# EAGLE board Large_Digit_Driver_Panel_v10 (EAGLE 7.2.0)
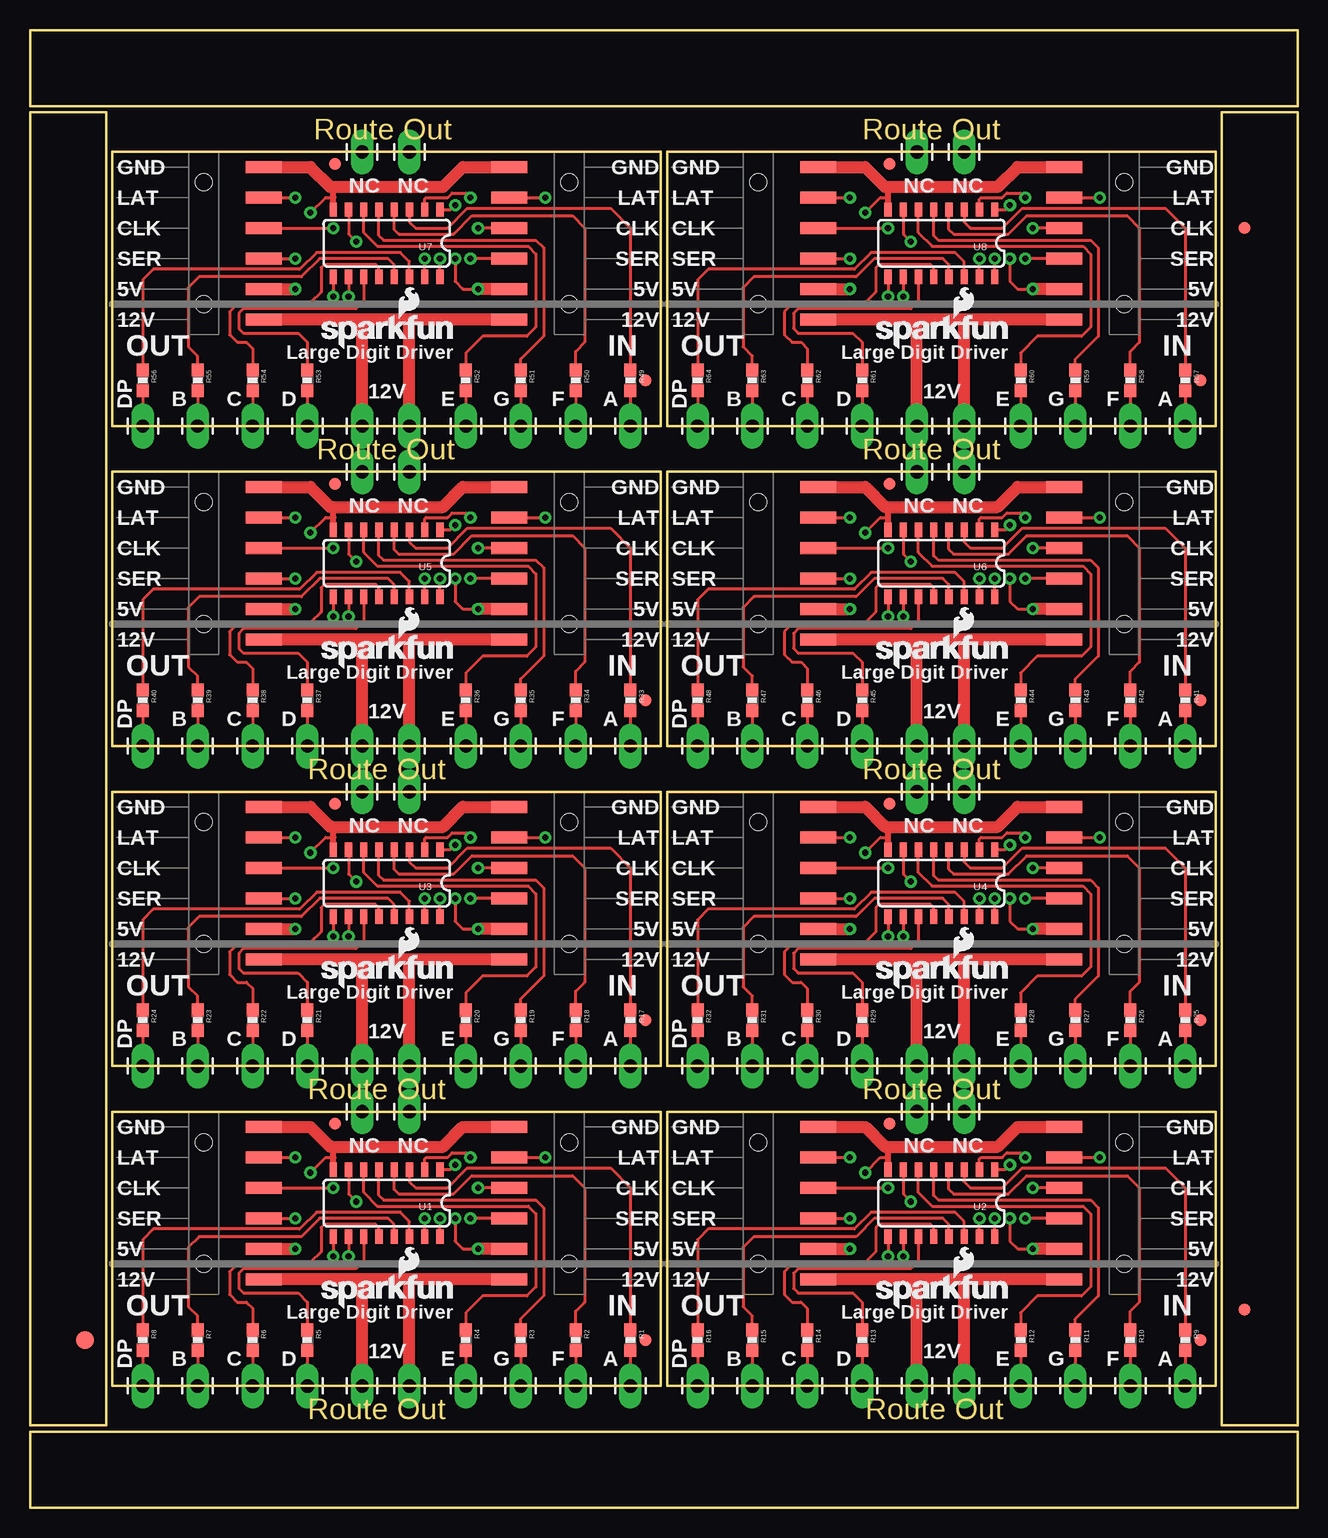
[diagram p0: board, top side]
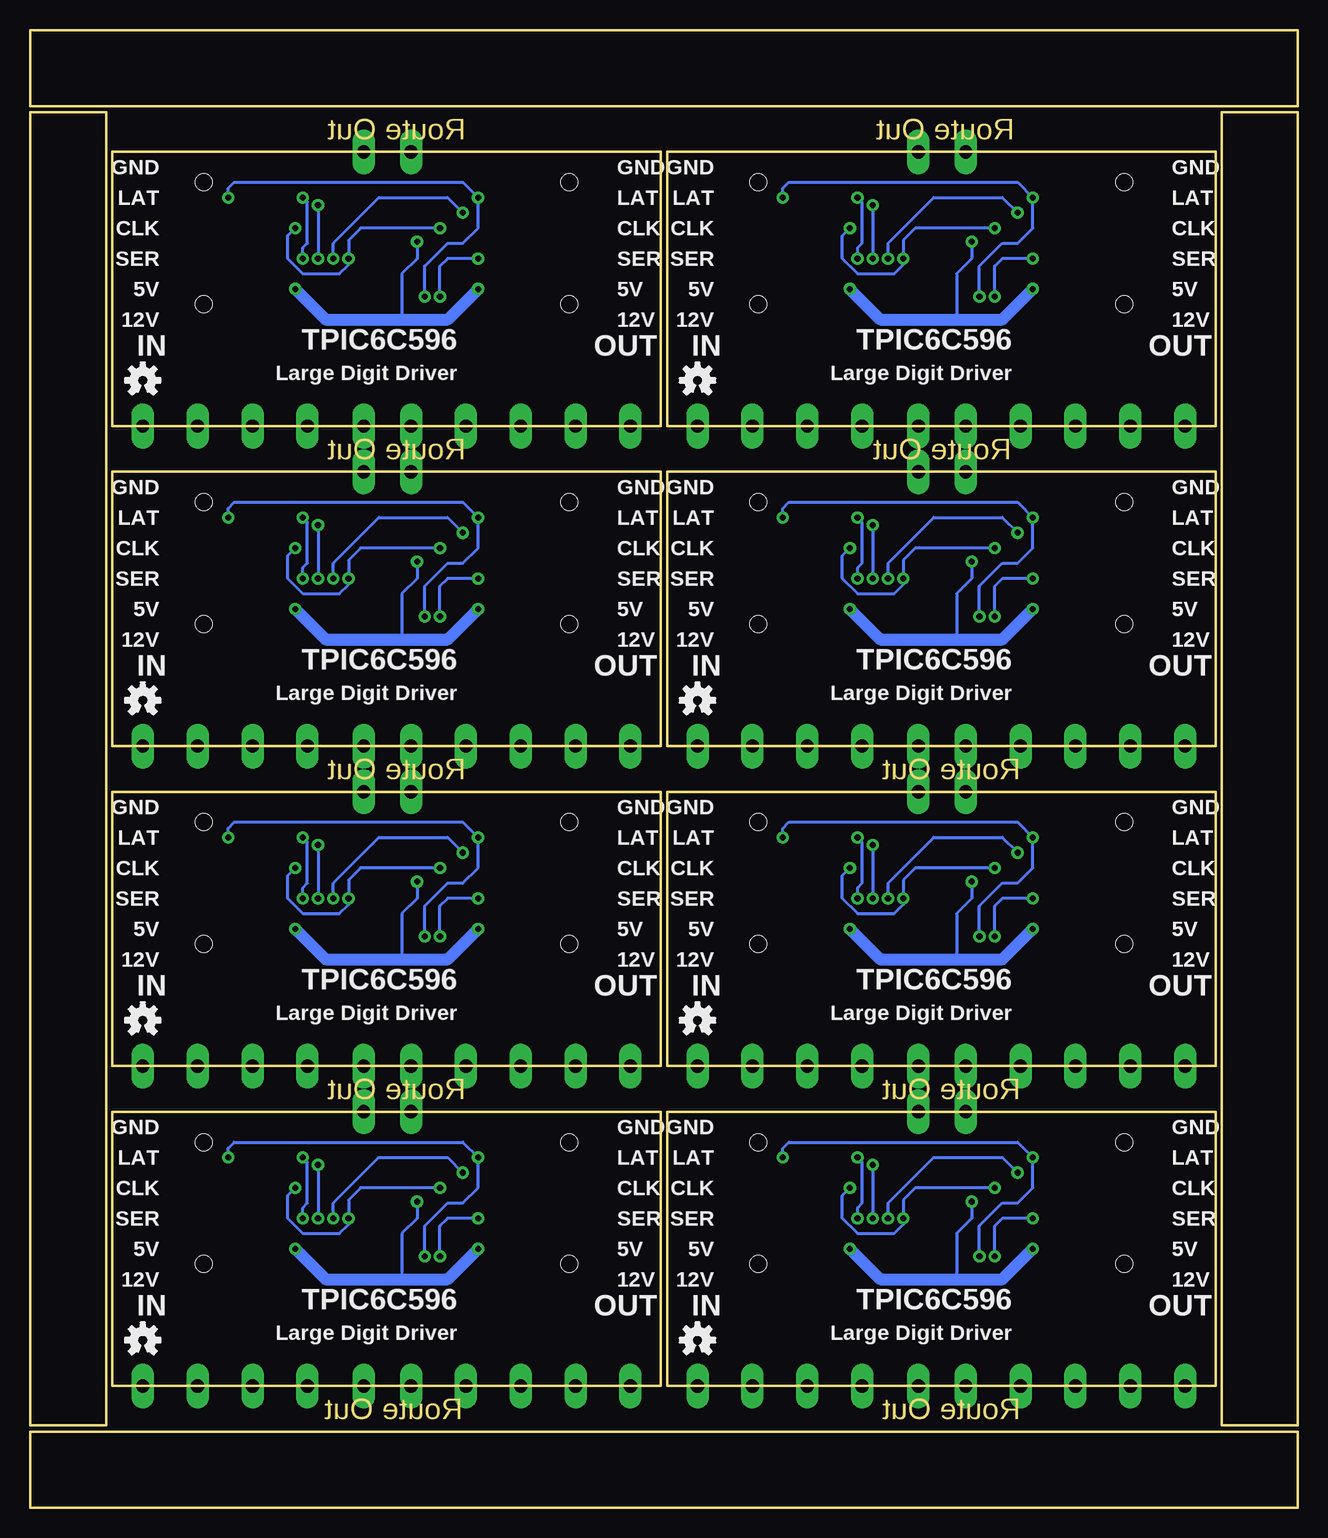
[diagram p1: board, bottom side, seen from below]

Size 105.66 x 123.19 mm. Coordinates in mm from the lower left corner, seen from the top.
Outline: 79.25,0 0,0 0,6.35 29.72,6.35
Outline: 27.18,6.35 105.66,6.35 105.66,0 76.71,0
Outline: 27.18,123.19 105.66,123.19 105.66,116.84 76.71,116.84
Outline: 79.25,116.84 0,116.84 0,123.19 29.72,123.19
Outline: 6.86,33.02 52.58,33.02 52.58,10.16 6.86,10.16 6.86,33.02
Outline: 53.09,33.02 98.81,33.02 98.81,10.16 53.09,10.16 53.09,33.02
Outline: 6.86,59.69 52.58,59.69 52.58,36.83 6.86,36.83 6.86,59.69
Outline: 53.09,59.69 98.81,59.69 98.81,36.83 53.09,36.83 53.09,59.69
Outline: 6.86,86.36 52.58,86.36 52.58,63.5 6.86,63.5 6.86,86.36
Outline: 53.09,86.36 98.81,86.36 98.81,63.5 53.09,63.5 53.09,86.36
Outline: 6.86,113.03 52.58,113.03 52.58,90.17 6.86,90.17 6.86,113.03
Outline: 53.09,113.03 98.81,113.03 98.81,90.17 53.09,90.17 53.09,113.03
Outline: 6.35,6.86 6.35,116.33 0,116.33 0,6.86 6.35,6.86
Outline: 105.66,6.86 105.66,116.33 99.31,116.33 99.31,6.86 105.66,6.86
Copper layers (1*16): Top 0.035mm / dielectric 1.5mm / Bottom 0.035mm
Design rules "SparkFun-2-layer": minimum track width 7mil, minimum drill 15mil, track to track 8mil, track to pad 8mil, pad to pad 8mil, via to via 8mil, smd to smd 8mil, copper to edge 8mil, drill to drill 8mil, minimum pad ring 12mil, minimum via ring 10mil, stop-mask expansion 4mil, vias tented up to drill 20mil, thermal gap 10mil
Net classes: 1 power: width 0.203 mm

## Footprints (pad centres in the part's own frame; a part is rotated, then mirrored left to right if it is on the bottom)
FIDUCIAL-1.5X3 = smd 1.5 x 1.5: 1 0,0
FIDUCIAL-1X2 = smd 1 x 1: 1 0,0
1X01_LONGPAD = drill 1.118 pad 1.88 long: 1 0,0
1X06-SMD = smd 1 x 3: 1 -6.35,5; 2 -3.81,5; 3 -1.27,5; 4 1.27,5; 5 3.81,5; 6 6.35,5 | hole 1.4: -5.08,0; 5.08,0
0603-RES = smd 1.1 x 1: 1 -0.85,0; 2 0.85,0
SO016 = smd 0.6 x 1.2: 1 -4.445,-2.8; 2 -3.175,-2.8; 3 -1.905,-2.8; 4 -0.635,-2.8; 5 0.635,-2.8; 6 1.905,-2.8; 7 3.175,-2.8; 8 4.445,-2.8; 9 4.445,2.8; 10 3.175,2.8; 11 1.905,2.8; 12 0.635,2.8; 13 -0.635,2.8; 14 -1.905,2.8; 15 -3.175,2.8; 16 -4.445,2.8

## Placement (x,y rotation side)
E$1  [FIDUCIAL-1.5X3]  4.57,13.97 0 top
E$4  [FIDUCIAL-1X2]  101.22,16.51 0 top
E$5  [FIDUCIAL-1X2]  101.22,106.68 180 top
FID1  FIDUCIAL1X2  [FIDUCIAL-1X2]  25.4,32 0 top
FID2  FIDUCIAL1X2  [FIDUCIAL-1X2]  51.31,13.97 0 top
FID3  FIDUCIAL1X2  [FIDUCIAL-1X2]  71.63,32 0 top
FID4  FIDUCIAL1X2  [FIDUCIAL-1X2]  97.54,13.97 0 top
FID5  FIDUCIAL1X2  [FIDUCIAL-1X2]  25.4,58.67 0 top
FID6  FIDUCIAL1X2  [FIDUCIAL-1X2]  51.31,40.64 0 top
FID7  FIDUCIAL1X2  [FIDUCIAL-1X2]  71.63,58.67 0 top
FID8  FIDUCIAL1X2  [FIDUCIAL-1X2]  97.54,40.64 0 top
FID9  FIDUCIAL1X2  [FIDUCIAL-1X2]  25.4,85.34 0 top
FID10  FIDUCIAL1X2  [FIDUCIAL-1X2]  51.31,67.31 0 top
FID11  FIDUCIAL1X2  [FIDUCIAL-1X2]  71.63,85.34 0 top
FID12  FIDUCIAL1X2  [FIDUCIAL-1X2]  97.54,67.31 0 top
FID13  FIDUCIAL1X2  [FIDUCIAL-1X2]  25.4,112.01 0 top
FID14  FIDUCIAL1X2  [FIDUCIAL-1X2]  51.31,93.98 0 top
FID15  FIDUCIAL1X2  [FIDUCIAL-1X2]  71.63,112.01 0 top
FID16  FIDUCIAL1X2  [FIDUCIAL-1X2]  97.54,93.98 0 top
JP1  [1X01_LONGPAD]  50.04,10.16 180 top
JP2  [1X06-SMD]  14.48,25.4 270 top
JP3  Anchor  [1X01_LONGPAD]  27.69,33.02 0 top
JP4  [1X01_LONGPAD]  45.47,10.16 180 top
JP5  [1X01_LONGPAD]  40.89,10.16 180 top
JP6  [1X01_LONGPAD]  36.32,10.16 180 top
JP7  [1X01_LONGPAD]  23.11,10.16 180 top
JP8  [1X01_LONGPAD]  18.54,10.16 180 top
JP9  [1X01_LONGPAD]  13.97,10.16 180 top
JP10  [1X01_LONGPAD]  9.4,10.16 180 top
JP11  [1X01_LONGPAD]  31.62,10.16 180 top
JP12  [1X01_LONGPAD]  27.69,10.16 180 top
JP13  [1X06-SMD]  44.96,25.4 90 top
JP14  Anchor  [1X01_LONGPAD]  31.62,33.02 0 top
JP15  [1X06-SMD]  60.71,25.4 270 top
JP16  [1X01_LONGPAD]  96.27,10.16 180 top
JP17  [1X01_LONGPAD]  91.69,10.16 180 top
JP18  [1X01_LONGPAD]  87.12,10.16 180 top
JP19  [1X01_LONGPAD]  82.55,10.16 180 top
JP20  [1X01_LONGPAD]  69.34,10.16 180 top
JP21  [1X01_LONGPAD]  64.77,10.16 180 top
JP22  [1X01_LONGPAD]  60.2,10.16 180 top
JP23  [1X01_LONGPAD]  55.63,10.16 180 top
JP24  [1X01_LONGPAD]  77.85,10.16 180 top
JP25  [1X01_LONGPAD]  73.91,10.16 180 top
JP26  [1X06-SMD]  91.19,25.4 90 top
JP27  Anchor  [1X01_LONGPAD]  73.91,33.02 0 top
JP28  Anchor  [1X01_LONGPAD]  77.85,33.02 0 top
JP29  [1X06-SMD]  14.48,52.07 270 top
JP30  [1X01_LONGPAD]  50.04,36.83 180 top
JP31  [1X01_LONGPAD]  45.47,36.83 180 top
JP32  [1X01_LONGPAD]  40.89,36.83 180 top
JP33  [1X01_LONGPAD]  36.32,36.83 180 top
JP34  [1X01_LONGPAD]  23.11,36.83 180 top
JP35  [1X01_LONGPAD]  18.54,36.83 180 top
JP36  [1X01_LONGPAD]  13.97,36.83 180 top
JP37  [1X01_LONGPAD]  9.4,36.83 180 top
JP38  [1X01_LONGPAD]  31.62,36.83 180 top
JP39  [1X01_LONGPAD]  27.69,36.83 180 top
JP40  [1X06-SMD]  44.96,52.07 90 top
JP41  Anchor  [1X01_LONGPAD]  27.69,59.69 0 top
JP42  Anchor  [1X01_LONGPAD]  31.62,59.69 0 top
JP43  [1X06-SMD]  60.71,52.07 270 top
JP44  [1X01_LONGPAD]  96.27,36.83 180 top
JP45  [1X01_LONGPAD]  91.69,36.83 180 top
JP46  [1X01_LONGPAD]  87.12,36.83 180 top
JP47  [1X01_LONGPAD]  82.55,36.83 180 top
JP48  [1X01_LONGPAD]  69.34,36.83 180 top
JP49  [1X01_LONGPAD]  64.77,36.83 180 top
JP50  [1X01_LONGPAD]  60.2,36.83 180 top
JP51  [1X01_LONGPAD]  55.63,36.83 180 top
JP52  [1X01_LONGPAD]  77.85,36.83 180 top
JP53  [1X01_LONGPAD]  73.91,36.83 180 top
JP54  [1X06-SMD]  91.19,52.07 90 top
JP55  Anchor  [1X01_LONGPAD]  73.91,59.69 0 top
JP56  Anchor  [1X01_LONGPAD]  77.85,59.69 0 top
JP57  [1X06-SMD]  14.48,78.74 270 top
JP58  [1X01_LONGPAD]  50.04,63.5 180 top
JP59  [1X01_LONGPAD]  45.47,63.5 180 top
JP60  [1X01_LONGPAD]  40.89,63.5 180 top
JP61  [1X01_LONGPAD]  36.32,63.5 180 top
JP62  [1X01_LONGPAD]  23.11,63.5 180 top
JP63  [1X01_LONGPAD]  18.54,63.5 180 top
JP64  [1X01_LONGPAD]  13.97,63.5 180 top
JP65  [1X01_LONGPAD]  9.4,63.5 180 top
JP66  [1X01_LONGPAD]  31.62,63.5 180 top
JP67  [1X01_LONGPAD]  27.69,63.5 180 top
JP68  [1X06-SMD]  44.96,78.74 90 top
JP69  Anchor  [1X01_LONGPAD]  27.69,86.36 0 top
JP70  Anchor  [1X01_LONGPAD]  31.62,86.36 0 top
JP71  [1X06-SMD]  60.71,78.74 270 top
JP72  [1X01_LONGPAD]  96.27,63.5 180 top
JP73  [1X01_LONGPAD]  91.69,63.5 180 top
JP74  [1X01_LONGPAD]  87.12,63.5 180 top
JP75  [1X01_LONGPAD]  82.55,63.5 180 top
JP76  [1X01_LONGPAD]  69.34,63.5 180 top
JP77  [1X01_LONGPAD]  64.77,63.5 180 top
JP78  [1X01_LONGPAD]  60.2,63.5 180 top
JP79  [1X01_LONGPAD]  55.63,63.5 180 top
JP80  [1X01_LONGPAD]  77.85,63.5 180 top
JP81  [1X01_LONGPAD]  73.91,63.5 180 top
JP82  [1X06-SMD]  91.19,78.74 90 top
JP83  Anchor  [1X01_LONGPAD]  73.91,86.36 0 top
JP84  Anchor  [1X01_LONGPAD]  77.85,86.36 0 top
JP85  [1X06-SMD]  14.48,105.41 270 top
JP86  [1X01_LONGPAD]  50.04,90.17 180 top
JP87  [1X01_LONGPAD]  45.47,90.17 180 top
JP88  [1X01_LONGPAD]  40.89,90.17 180 top
JP89  [1X01_LONGPAD]  36.32,90.17 180 top
JP90  [1X01_LONGPAD]  23.11,90.17 180 top
JP91  [1X01_LONGPAD]  18.54,90.17 180 top
JP92  [1X01_LONGPAD]  13.97,90.17 180 top
JP93  [1X01_LONGPAD]  9.4,90.17 180 top
JP94  [1X01_LONGPAD]  31.62,90.17 180 top
JP95  [1X01_LONGPAD]  27.69,90.17 180 top
JP96  [1X06-SMD]  44.96,105.41 90 top
JP97  Anchor  [1X01_LONGPAD]  27.69,113.03 0 top
JP98  Anchor  [1X01_LONGPAD]  31.62,113.03 0 top
JP99  [1X06-SMD]  60.71,105.41 270 top
JP100  [1X01_LONGPAD]  96.27,90.17 180 top
JP101  [1X01_LONGPAD]  91.69,90.17 180 top
JP102  [1X01_LONGPAD]  87.12,90.17 180 top
JP103  [1X01_LONGPAD]  82.55,90.17 180 top
JP104  [1X01_LONGPAD]  69.34,90.17 180 top
JP105  [1X01_LONGPAD]  64.77,90.17 180 top
JP106  [1X01_LONGPAD]  60.2,90.17 180 top
JP107  [1X01_LONGPAD]  55.63,90.17 180 top
JP108  [1X01_LONGPAD]  77.85,90.17 180 top
JP109  [1X01_LONGPAD]  73.91,90.17 180 top
JP110  [1X06-SMD]  91.19,105.41 90 top
JP111  Anchor  [1X01_LONGPAD]  73.91,113.03 0 top
JP112  Anchor  [1X01_LONGPAD]  77.85,113.03 0 top
LOGO1  SFE_LOGO_NAME_FLAME.1_INCH  [SFE_LOGO_NAME_FLAME_.1]  23.88,16.51 0 top
LOGO2  OSHW-LOGOS  [OSHW-LOGO-S]  50.04,13.97 0 bottom
LOGO3  OSHW-LOGOS  [OSHW-LOGO-S]  96.27,13.97 0 bottom
LOGO4  SFE_LOGO_NAME_FLAME.1_INCH  [SFE_LOGO_NAME_FLAME_.1]  70.1,16.51 0 top
LOGO5  OSHW-LOGOS  [OSHW-LOGO-S]  50.04,40.64 0 bottom
LOGO6  SFE_LOGO_NAME_FLAME.1_INCH  [SFE_LOGO_NAME_FLAME_.1]  23.88,43.18 0 top
LOGO7  OSHW-LOGOS  [OSHW-LOGO-S]  96.27,40.64 0 bottom
LOGO8  SFE_LOGO_NAME_FLAME.1_INCH  [SFE_LOGO_NAME_FLAME_.1]  70.1,43.18 0 top
LOGO9  OSHW-LOGOS  [OSHW-LOGO-S]  50.04,67.31 0 bottom
LOGO10  SFE_LOGO_NAME_FLAME.1_INCH  [SFE_LOGO_NAME_FLAME_.1]  23.88,69.85 0 top
LOGO11  OSHW-LOGOS  [OSHW-LOGO-S]  96.27,67.31 0 bottom
LOGO12  SFE_LOGO_NAME_FLAME.1_INCH  [SFE_LOGO_NAME_FLAME_.1]  70.1,69.85 0 top
LOGO13  OSHW-LOGOS  [OSHW-LOGO-S]  50.04,93.98 0 bottom
LOGO14  SFE_LOGO_NAME_FLAME.1_INCH  [SFE_LOGO_NAME_FLAME_.1]  23.88,96.52 0 top
LOGO15  OSHW-LOGOS  [OSHW-LOGO-S]  96.27,93.98 0 bottom
LOGO16  SFE_LOGO_NAME_FLAME.1_INCH  [SFE_LOGO_NAME_FLAME_.1]  70.1,96.52 0 top
R1  15  [0603-RES]  50.04,13.97 270 top
R2  15  [0603-RES]  45.47,13.97 270 top
R3  15  [0603-RES]  40.89,13.97 270 top
R4  15  [0603-RES]  36.32,13.97 270 top
R5  15  [0603-RES]  23.11,13.97 270 top
R6  15  [0603-RES]  18.54,13.97 270 top
R7  15  [0603-RES]  13.97,13.97 270 top
R8  15  [0603-RES]  9.4,13.97 270 top
R9  15  [0603-RES]  96.27,13.97 270 top
R10  15  [0603-RES]  91.69,13.97 270 top
R11  15  [0603-RES]  87.12,13.97 270 top
R12  15  [0603-RES]  82.55,13.97 270 top
R13  15  [0603-RES]  69.34,13.97 270 top
R14  15  [0603-RES]  64.77,13.97 270 top
R15  15  [0603-RES]  60.2,13.97 270 top
R16  15  [0603-RES]  55.63,13.97 270 top
R17  15  [0603-RES]  50.04,40.64 270 top
R18  15  [0603-RES]  45.47,40.64 270 top
R19  15  [0603-RES]  40.89,40.64 270 top
R20  15  [0603-RES]  36.32,40.64 270 top
R21  15  [0603-RES]  23.11,40.64 270 top
R22  15  [0603-RES]  18.54,40.64 270 top
R23  15  [0603-RES]  13.97,40.64 270 top
R24  15  [0603-RES]  9.4,40.64 270 top
R25  15  [0603-RES]  96.27,40.64 270 top
R26  15  [0603-RES]  91.69,40.64 270 top
R27  15  [0603-RES]  87.12,40.64 270 top
R28  15  [0603-RES]  82.55,40.64 270 top
R29  15  [0603-RES]  69.34,40.64 270 top
R30  15  [0603-RES]  64.77,40.64 270 top
R31  15  [0603-RES]  60.2,40.64 270 top
R32  15  [0603-RES]  55.63,40.64 270 top
R33  15  [0603-RES]  50.04,67.31 270 top
R34  15  [0603-RES]  45.47,67.31 270 top
R35  15  [0603-RES]  40.89,67.31 270 top
R36  15  [0603-RES]  36.32,67.31 270 top
R37  15  [0603-RES]  23.11,67.31 270 top
R38  15  [0603-RES]  18.54,67.31 270 top
R39  15  [0603-RES]  13.97,67.31 270 top
R40  15  [0603-RES]  9.4,67.31 270 top
R41  15  [0603-RES]  96.27,67.31 270 top
R42  15  [0603-RES]  91.69,67.31 270 top
R43  15  [0603-RES]  87.12,67.31 270 top
R44  15  [0603-RES]  82.55,67.31 270 top
R45  15  [0603-RES]  69.34,67.31 270 top
R46  15  [0603-RES]  64.77,67.31 270 top
R47  15  [0603-RES]  60.2,67.31 270 top
R48  15  [0603-RES]  55.63,67.31 270 top
R49  15  [0603-RES]  50.04,93.98 270 top
R50  15  [0603-RES]  45.47,93.98 270 top
R51  15  [0603-RES]  40.89,93.98 270 top
R52  15  [0603-RES]  36.32,93.98 270 top
R53  15  [0603-RES]  23.11,93.98 270 top
R54  15  [0603-RES]  18.54,93.98 270 top
R55  15  [0603-RES]  13.97,93.98 270 top
R56  15  [0603-RES]  9.4,93.98 270 top
R57  15  [0603-RES]  96.27,93.98 270 top
R58  15  [0603-RES]  91.69,93.98 270 top
R59  15  [0603-RES]  87.12,93.98 270 top
R60  15  [0603-RES]  82.55,93.98 270 top
R61  15  [0603-RES]  69.34,93.98 270 top
R62  15  [0603-RES]  64.77,93.98 270 top
R63  15  [0603-RES]  60.2,93.98 270 top
R64  15  [0603-RES]  55.63,93.98 270 top
U1  TPIC6C596  [SO016]  29.72,25.4 180 top
U2  TPIC6C596  [SO016]  75.95,25.4 180 top
U3  TPIC6C596  [SO016]  29.72,52.07 180 top
U4  TPIC6C596  [SO016]  75.95,52.07 180 top
U5  TPIC6C596  [SO016]  29.72,78.74 180 top
U6  TPIC6C596  [SO016]  75.95,78.74 180 top
U7  TPIC6C596  [SO016]  29.72,105.41 180 top
U8  TPIC6C596  [SO016]  75.95,105.41 180 top

## Library data of the parts
E$1 = SparkFun-Retired
E$4 E$5 FID1-FID16 LOGO1-LOGO16 = SparkFun-Aesthetics
JP1 JP3-JP12 JP14 JP16-JP25 JP27 JP28 JP30-JP39 JP41 JP42 JP44-JP53 JP55 JP56 JP58-JP67 JP69 JP70 JP72-JP81 JP83 JP84 JP86-JP95 JP97 JP98 JP100-JP109 JP111 JP112 = SparkFun-Connectors
JP2 JP13 JP15 JP26 JP29 JP40 JP43 JP54 JP57 JP68 JP71 JP82 JP85 JP96 JP99 JP110 = SparkFun-Connectors; PROD_ID: CONN-08971; VALUE: RA 6Pin SMD
R1-R64 = SparkFun-Resistors; PROD_ID: RES-12570
U1-U8 = SparkFun-DigitalIC; PROD_ID: IC-12522

## Nets
5V: JP2.5 JP13.2 U1.1 U1.7
5V1: JP15.5 JP26.2 U2.1 U2.7
5V2: JP29.5 JP40.2 U3.1 U3.7
5V3: JP43.5 JP54.2 U4.1 U4.7
5V4: JP57.5 JP68.2 U5.1 U5.7
5V5: JP71.5 JP82.2 U6.1 U6.7
5V6: JP85.5 JP96.2 U7.1 U7.7
5V7: JP99.5 JP110.2 U8.1 U8.7
12V: JP2.6 JP11.1 JP12.1 JP13.1
12V1: JP15.6 JP24.1 JP25.1 JP26.1
12V2: JP29.6 JP38.1 JP39.1 JP40.1
12V3: JP43.6 JP52.1 JP53.1 JP54.1
12V4: JP57.6 JP66.1 JP67.1 JP68.1
12V5: JP71.6 JP80.1 JP81.1 JP82.1
12V6: JP85.6 JP94.1 JP95.1 JP96.1
12V7: JP99.6 JP108.1 JP109.1 JP110.1
CLOCK: JP2.3 JP13.4 U1.15
CLOCK1: JP15.3 JP26.4 U2.15
CLOCK2: JP29.3 JP40.4 U3.15
CLOCK3: JP43.3 JP54.4 U4.15
CLOCK4: JP57.3 JP68.4 U5.15
CLOCK5: JP71.3 JP82.4 U6.15
CLOCK6: JP85.3 JP96.4 U7.15
CLOCK7: JP99.3 JP110.4 U8.15
D0: R1.1 U1.3
D1: R2.1 U1.4
D2: R3.1 U1.5
D3: R4.1 U1.6
D4: R5.1 U1.11
D5: R6.1 U1.12
D6: R7.1 U1.13
D7: R8.1 U1.14
D8: R9.1 U2.3
D9: R10.1 U2.4
D10: R11.1 U2.5
D11: R12.1 U2.6
D12: R13.1 U2.11
D13: R14.1 U2.12
D14: R15.1 U2.13
D15: R16.1 U2.14
D16: R17.1 U3.3
D17: R18.1 U3.4
D18: R19.1 U3.5
D19: R20.1 U3.6
D20: R21.1 U3.11
D21: R22.1 U3.12
D22: R23.1 U3.13
D23: R24.1 U3.14
D24: R25.1 U4.3
D25: R26.1 U4.4
D26: R27.1 U4.5
D27: R28.1 U4.6
D28: R29.1 U4.11
D29: R30.1 U4.12
D30: R31.1 U4.13
D31: R32.1 U4.14
D32: R33.1 U5.3
D33: R34.1 U5.4
D34: R35.1 U5.5
D35: R36.1 U5.6
D36: R37.1 U5.11
D37: R38.1 U5.12
D38: R39.1 U5.13
D39: R40.1 U5.14
D40: R41.1 U6.3
D41: R42.1 U6.4
D42: R43.1 U6.5
D43: R44.1 U6.6
D44: R45.1 U6.11
D45: R46.1 U6.12
D46: R47.1 U6.13
D47: R48.1 U6.14
D48: R49.1 U7.3
D49: R50.1 U7.4
D50: R51.1 U7.5
D51: R52.1 U7.6
D52: R53.1 U7.11
D53: R54.1 U7.12
D54: R55.1 U7.13
D55: R56.1 U7.14
D56: R57.1 U8.3
D57: R58.1 U8.4
D58: R59.1 U8.5
D59: R60.1 U8.6
D60: R61.1 U8.11
D61: R62.1 U8.12
D62: R63.1 U8.13
D63: R64.1 U8.14
GND: JP2.1 JP13.6 U1.8 U1.16
GND1: JP15.1 JP26.6 U2.8 U2.16
GND2: JP29.1 JP40.6 U3.8 U3.16
GND3: JP43.1 JP54.6 U4.8 U4.16
GND4: JP57.1 JP68.6 U5.8 U5.16
GND5: JP71.1 JP82.6 U6.8 U6.16
GND6: JP85.1 JP96.6 U7.8 U7.16
GND7: JP99.1 JP110.6 U8.8 U8.16
LATCH: JP2.2 JP13.5 U1.10
LATCH1: JP15.2 JP26.5 U2.10
LATCH2: JP29.2 JP40.5 U3.10
LATCH3: JP43.2 JP54.5 U4.10
LATCH4: JP57.2 JP68.5 U5.10
LATCH5: JP71.2 JP82.5 U6.10
LATCH6: JP85.2 JP96.5 U7.10
LATCH7: JP99.2 JP110.5 U8.10
S0: JP1.1 R1.2
S1: JP4.1 R2.2
S2: JP5.1 R3.2
S3: JP6.1 R4.2
S4: JP7.1 R5.2
S5: JP8.1 R6.2
S6: JP9.1 R7.2
S7: JP10.1 R8.2
S8: JP16.1 R9.2
S9: JP17.1 R10.2
S10: JP18.1 R11.2
S11: JP19.1 R12.2
S12: JP20.1 R13.2
S13: JP21.1 R14.2
S14: JP22.1 R15.2
S15: JP23.1 R16.2
S16: JP30.1 R17.2
S17: JP31.1 R18.2
S18: JP32.1 R19.2
S19: JP33.1 R20.2
S20: JP34.1 R21.2
S21: JP35.1 R22.2
S22: JP36.1 R23.2
S23: JP37.1 R24.2
S24: JP44.1 R25.2
S25: JP45.1 R26.2
S26: JP46.1 R27.2
S27: JP47.1 R28.2
S28: JP48.1 R29.2
S29: JP49.1 R30.2
S30: JP50.1 R31.2
S31: JP51.1 R32.2
S32: JP58.1 R33.2
S33: JP59.1 R34.2
S34: JP60.1 R35.2
S35: JP61.1 R36.2
S36: JP62.1 R37.2
S37: JP63.1 R38.2
S38: JP64.1 R39.2
S39: JP65.1 R40.2
S40: JP72.1 R41.2
S41: JP73.1 R42.2
S42: JP74.1 R43.2
S43: JP75.1 R44.2
S44: JP76.1 R45.2
S45: JP77.1 R46.2
S46: JP78.1 R47.2
S47: JP79.1 R48.2
S48: JP86.1 R49.2
S49: JP87.1 R50.2
S50: JP88.1 R51.2
S51: JP89.1 R52.2
S52: JP90.1 R53.2
S53: JP91.1 R54.2
S54: JP92.1 R55.2
S55: JP93.1 R56.2
S56: JP100.1 R57.2
S57: JP101.1 R58.2
S58: JP102.1 R59.2
S59: JP103.1 R60.2
S60: JP104.1 R61.2
S61: JP105.1 R62.2
S62: JP106.1 R63.2
S63: JP107.1 R64.2
SER_IN: JP13.3 U1.2
SER_IN1: JP26.3 U2.2
SER_IN2: JP40.3 U3.2
SER_IN3: JP54.3 U4.2
SER_IN4: JP68.3 U5.2
SER_IN5: JP82.3 U6.2
SER_IN6: JP96.3 U7.2
SER_IN7: JP110.3 U8.2
SER_OUT: JP2.4 U1.9
SER_OUT1: JP15.4 U2.9
SER_OUT2: JP29.4 U3.9
SER_OUT3: JP43.4 U4.9
SER_OUT4: JP57.4 U5.9
SER_OUT5: JP71.4 U6.9
SER_OUT6: JP85.4 U7.9
SER_OUT7: JP99.4 U8.9

## Tracks (layer width: path | path; a pad name or v marks a point on that pad's centre or on a via)
5V  (via drill 0.51)
  Top 0.254: v27.18,25.53 26.54,26.16 U1.7 | v35.43,24.13 35.43,22.23 36.07,21.59 v37.34,21.59 | U1.1 35.06,28.2 v35.43,28.57
  Top 1.016: JP2.5 v22.1,21.59 | JP13.2 v37.34,21.59
  Bottom 0.254: v27.18,25.53 27.18,24.13 28.45,22.86 28.45,19.05 | v35.43,28.57 v35.43,24.13
  Bottom 1.016: v37.34,21.59 34.8,19.05 28.45,19.05 24.64,19.05 v22.1,21.59
5V1  (via drill 0.51)
  Top 0.254: v73.41,25.53 72.77,26.16 U2.7 | v81.66,24.13 81.66,22.23 82.3,21.59 v83.57,21.59 | U2.1 81.29,28.2 v81.66,28.57
  Top 1.016: JP15.5 v68.33,21.59 | JP26.2 v83.57,21.59
  Bottom 0.254: v73.41,25.53 73.41,24.13 74.68,22.86 74.68,19.05 | v81.66,28.57 v81.66,24.13
  Bottom 1.016: v83.57,21.59 81.03,19.05 74.68,19.05 70.87,19.05 v68.33,21.59
5V2  (via drill 0.51)
  Top 0.254: v27.18,52.2 26.54,52.83 U3.7 | v35.43,50.8 35.43,48.9 36.07,48.26 v37.34,48.26 | U3.1 35.06,54.87 v35.43,55.24
  Top 1.016: JP29.5 v22.1,48.26 | JP40.2 v37.34,48.26
  Bottom 0.254: v27.18,52.2 27.18,50.8 28.45,49.53 28.45,45.72 | v35.43,55.24 v35.43,50.8
  Bottom 1.016: v37.34,48.26 34.8,45.72 28.45,45.72 24.64,45.72 v22.1,48.26
5V3  (via drill 0.51)
  Top 0.254: v73.41,52.2 72.77,52.83 U4.7 | v81.66,50.8 81.66,48.9 82.3,48.26 v83.57,48.26 | U4.1 81.29,54.87 v81.66,55.24
  Top 1.016: JP43.5 v68.33,48.26 | JP54.2 v83.57,48.26
  Bottom 0.254: v73.41,52.2 73.41,50.8 74.68,49.53 74.68,45.72 | v81.66,55.24 v81.66,50.8
  Bottom 1.016: v83.57,48.26 81.03,45.72 74.68,45.72 70.87,45.72 v68.33,48.26
5V4  (via drill 0.51)
  Top 0.254: v27.18,78.87 26.54,79.5 U5.7 | v35.43,77.47 35.43,75.56 36.07,74.93 v37.34,74.93 | U5.1 35.06,81.54 v35.43,81.92
  Top 1.016: JP57.5 v22.1,74.93 | JP68.2 v37.34,74.93
  Bottom 0.254: v27.18,78.87 27.18,77.47 28.45,76.2 28.45,72.39 | v35.43,81.92 v35.43,77.47
  Bottom 1.016: v37.34,74.93 34.8,72.39 28.45,72.39 24.64,72.39 v22.1,74.93
5V5  (via drill 0.51)
  Top 0.254: v73.41,78.87 72.77,79.5 U6.7 | v81.66,77.47 81.66,75.56 82.3,74.93 v83.57,74.93 | U6.1 81.29,81.54 v81.66,81.92
  Top 1.016: JP71.5 v68.33,74.93 | JP82.2 v83.57,74.93
  Bottom 0.254: v73.41,78.87 73.41,77.47 74.68,76.2 74.68,72.39 | v81.66,81.92 v81.66,77.47
  Bottom 1.016: v83.57,74.93 81.03,72.39 74.68,72.39 70.87,72.39 v68.33,74.93
5V6  (via drill 0.51)
  Top 0.254: v27.18,105.54 26.54,106.17 U7.7 | v35.43,104.14 35.43,102.23 36.07,101.6 v37.34,101.6 | U7.1 35.06,108.21 v35.43,108.58
  Top 1.016: JP85.5 v22.1,101.6 | JP96.2 v37.34,101.6
  Bottom 0.254: v27.18,105.54 27.18,104.14 28.45,102.87 28.45,99.06 | v35.43,108.58 v35.43,104.14
  Bottom 1.016: v37.34,101.6 34.8,99.06 28.45,99.06 24.64,99.06 v22.1,101.6
5V7  (via drill 0.51)
  Top 0.254: v73.41,105.54 72.77,106.17 U8.7 | v81.66,104.14 81.66,102.23 82.3,101.6 v83.57,101.6 | U8.1 81.29,108.21 v81.66,108.58
  Top 1.016: JP99.5 v68.33,101.6 | JP110.2 v83.57,101.6
  Bottom 0.254: v73.41,105.54 73.41,104.14 74.68,102.87 74.68,99.06 | v81.66,108.58 v81.66,104.14
  Bottom 1.016: v83.57,101.6 81.03,99.06 74.68,99.06 70.87,99.06 v68.33,101.6
12V
  Top 0.254: 27.69,18.92 27.56,19.05
  Top 1.016: JP13.1 31.62,19.05 | 31.62,19.05 27.56,19.05 JP2.6 | JP12.1 27.69,18.92 | JP11.1 31.62,19.05
12V1
  Top 0.254: 73.91,18.92 73.79,19.05
  Top 1.016: JP26.1 77.85,19.05 | 77.85,19.05 73.79,19.05 JP15.6 | JP25.1 73.91,18.92 | JP24.1 77.85,19.05
12V2
  Top 0.254: 27.69,45.59 27.56,45.72
  Top 1.016: JP40.1 31.62,45.72 | 31.62,45.72 27.56,45.72 JP29.6 | JP39.1 27.69,45.59 | JP38.1 31.62,45.72
12V3
  Top 0.254: 73.91,45.59 73.79,45.72
  Top 1.016: JP54.1 77.85,45.72 | 77.85,45.72 73.79,45.72 JP43.6 | JP53.1 73.91,45.59 | JP52.1 77.85,45.72
12V4
  Top 0.254: 27.69,72.26 27.56,72.39
  Top 1.016: JP68.1 31.62,72.39 | 31.62,72.39 27.56,72.39 JP57.6 | JP67.1 27.69,72.26 | JP66.1 31.62,72.39
12V5
  Top 0.254: 73.91,72.26 73.79,72.39
  Top 1.016: JP82.1 77.85,72.39 | 77.85,72.39 73.79,72.39 JP71.6 | JP81.1 73.91,72.26 | JP80.1 77.85,72.39
12V6
  Top 0.254: 27.69,98.93 27.56,99.06
  Top 1.016: JP96.1 31.62,99.06 | 31.62,99.06 27.56,99.06 JP85.6 | JP95.1 27.69,98.93 | JP94.1 31.62,99.06
12V7
  Top 0.254: 73.91,98.93 73.79,99.06
  Top 1.016: JP110.1 77.85,99.06 | 77.85,99.06 73.79,99.06 JP99.6 | JP109.1 73.91,98.93 | JP108.1 77.85,99.06
CLOCK  (via drill 0.51)
  Top 0.254: JP2.3 v25.27,26.67 | JP13.4 v37.34,26.67 | U1.15 v32.89,24.13
  Bottom 0.254: v25.27,26.67 31.88,26.67 32.89,25.65 v32.89,24.13 32.89,23.62 33.66,22.86 36.7,22.86 37.97,24.13 37.97,26.04 v37.34,26.67
CLOCK1  (via drill 0.51)
  Top 0.254: JP15.3 v71.5,26.67 | JP26.4 v83.57,26.67 | U2.15 v79.12,24.13
  Bottom 0.254: v71.5,26.67 78.11,26.67 79.12,25.65 v79.12,24.13 79.12,23.62 79.88,22.86 82.93,22.86 84.2,24.13 84.2,26.04 v83.57,26.67
CLOCK2  (via drill 0.51)
  Top 0.254: JP29.3 v25.27,53.34 | JP40.4 v37.34,53.34 | U3.15 v32.89,50.8
  Bottom 0.254: v25.27,53.34 31.88,53.34 32.89,52.32 v32.89,50.8 32.89,50.29 33.66,49.53 36.7,49.53 37.97,50.8 37.97,52.7 v37.34,53.34
CLOCK3  (via drill 0.51)
  Top 0.254: JP43.3 v71.5,53.34 | JP54.4 v83.57,53.34 | U4.15 v79.12,50.8
  Bottom 0.254: v71.5,53.34 78.11,53.34 79.12,52.32 v79.12,50.8 79.12,50.29 79.88,49.53 82.93,49.53 84.2,50.8 84.2,52.7 v83.57,53.34
CLOCK4  (via drill 0.51)
  Top 0.254: JP57.3 v25.27,80.01 | JP68.4 v37.34,80.01 | U5.15 v32.89,77.47
  Bottom 0.254: v25.27,80.01 31.88,80.01 32.89,78.99 v32.89,77.47 32.89,76.96 33.66,76.2 36.7,76.2 37.97,77.47 37.97,79.38 v37.34,80.01
CLOCK5  (via drill 0.51)
  Top 0.254: JP71.3 v71.5,80.01 | JP82.4 v83.57,80.01 | U6.15 v79.12,77.47
  Bottom 0.254: v71.5,80.01 78.11,80.01 79.12,78.99 v79.12,77.47 79.12,76.96 79.88,76.2 82.93,76.2 84.2,77.47 84.2,79.38 v83.57,80.01
CLOCK6  (via drill 0.51)
  Top 0.254: JP85.3 v25.27,106.68 | JP96.4 v37.34,106.68 | U7.15 v32.89,104.14
  Bottom 0.254: v25.27,106.68 31.88,106.68 32.89,105.66 v32.89,104.14 32.89,103.63 33.66,102.87 36.7,102.87 37.97,104.14 37.97,106.05 v37.34,106.68
CLOCK7  (via drill 0.51)
  Top 0.254: JP99.3 v71.5,106.68 | JP110.4 v83.57,106.68 | U8.15 v79.12,104.14
  Bottom 0.254: v71.5,106.68 78.11,106.68 79.12,105.66 v79.12,104.14 79.12,103.63 79.88,102.87 82.93,102.87 84.2,104.14 84.2,106.05 v83.57,106.68
D0
  Top 0.254: R1.1 50.04,26.67 48.39,28.32 36.45,28.32 34.8,26.67 32.13,26.67 31.62,27.18 U1.3
D1
  Top 0.254: R2.1 45.47,16.38 46.23,17.14 46.23,26.67 45.21,27.69 36.83,27.69 35.31,26.16 30.73,26.16 30.35,26.54 U1.4
D2
  Top 0.254: R3.1 40.89,15.75 42.8,17.65 42.8,25.02 42.16,25.65 29.46,25.65 29.08,26.04 U1.5
D3
  Top 0.254: R4.1 36.32,16.26 37.72,17.65 41.4,17.65 42.16,18.41 42.16,24.51 41.53,25.15 28.96,25.15 27.81,26.29 U1.6
D4
  Top 0.254: R5.1 23.11,17.14 22.35,17.91 17.78,17.91 17.4,18.29 17.4,19.56 17.78,19.94 27.18,19.94 27.81,20.57 U1.11
D5
  Top 0.254: R6.1 18.54,16.64 18.03,17.14 17.27,17.14 16.64,17.78 16.64,19.68 17.4,20.45 23.37,20.45 24.26,21.34 24.26,23.37 24.51,23.62 28.83,23.62 29.08,23.37 U1.12
D6
  Top 0.254: R7.1 13.97,16 13.21,16.76 13.21,21.72 14.1,22.61 22.61,22.61 24.13,24.13 29.84,24.13 30.35,23.62 U1.13
D7
  Top 0.254: R8.1 9.4,22.35 10.29,23.24 22.48,23.24 23.88,24.64 30.86,24.64 31.62,23.88 U1.14
D8
  Top 0.254: R9.1 96.27,26.67 94.61,28.32 82.68,28.32 81.03,26.67 78.36,26.67 77.85,27.18 U2.3
D9
  Top 0.254: R10.1 91.69,16.38 92.46,17.14 92.46,26.67 91.44,27.69 83.06,27.69 81.53,26.16 76.96,26.16 76.58,26.54 U2.4
D10
  Top 0.254: R11.1 87.12,15.75 89.03,17.65 89.03,25.02 88.39,25.65 75.69,25.65 75.31,26.04 U2.5
D11
  Top 0.254: R12.1 82.55,16.26 83.95,17.65 87.63,17.65 88.39,18.41 88.39,24.51 87.76,25.15 75.18,25.15 74.04,26.29 U2.6
D12
  Top 0.254: R13.1 69.34,17.14 68.58,17.91 64.01,17.91 63.63,18.29 63.63,19.56 64.01,19.94 73.41,19.94 74.04,20.57 U2.11
D13
  Top 0.254: R14.1 64.77,16.64 64.26,17.14 63.5,17.14 62.87,17.78 62.87,19.68 63.63,20.45 69.6,20.45 70.48,21.34 70.48,23.37 70.74,23.62 75.06,23.62 75.31,23.37 U2.12
D14
  Top 0.254: R15.1 60.2,16 59.44,16.76 59.44,21.72 60.33,22.61 68.83,22.61 70.36,24.13 76.07,24.13 76.58,23.62 U2.13
D15
  Top 0.254: R16.1 55.63,22.35 56.52,23.24 68.71,23.24 70.1,24.64 77.09,24.64 77.85,23.88 U2.14
D16
  Top 0.254: R17.1 50.04,53.34 48.39,54.99 36.45,54.99 34.8,53.34 32.13,53.34 31.62,53.85 U3.3
D17
  Top 0.254: R18.1 45.47,43.05 46.23,43.81 46.23,53.34 45.21,54.36 36.83,54.36 35.31,52.83 30.73,52.83 30.35,53.21 U3.4
D18
  Top 0.254: R19.1 40.89,42.42 42.8,44.32 42.8,51.69 42.16,52.32 29.46,52.32 29.08,52.7 U3.5
D19
  Top 0.254: R20.1 36.32,42.93 37.72,44.32 41.4,44.32 42.16,45.09 42.16,51.18 41.53,51.82 28.96,51.82 27.81,52.96 U3.6
D20
  Top 0.254: R21.1 23.11,43.81 22.35,44.58 17.78,44.58 17.4,44.96 17.4,46.23 17.78,46.61 27.18,46.61 27.81,47.24 U3.11
D21
  Top 0.254: R22.1 18.54,43.31 18.03,43.81 17.27,43.81 16.64,44.45 16.64,46.35 17.4,47.12 23.37,47.12 24.26,48.01 24.26,50.04 24.51,50.29 28.83,50.29 29.08,50.04 U3.12
D22
  Top 0.254: R23.1 13.97,42.67 13.21,43.43 13.21,48.39 14.1,49.28 22.61,49.28 24.13,50.8 29.84,50.8 30.35,50.29 U3.13
D23
  Top 0.254: R24.1 9.4,49.02 10.29,49.91 22.48,49.91 23.88,51.31 30.86,51.31 31.62,50.55 U3.14
D24
  Top 0.254: R25.1 96.27,53.34 94.61,54.99 82.68,54.99 81.03,53.34 78.36,53.34 77.85,53.85 U4.3
D25
  Top 0.254: R26.1 91.69,43.05 92.46,43.81 92.46,53.34 91.44,54.36 83.06,54.36 81.53,52.83 76.96,52.83 76.58,53.21 U4.4
D26
  Top 0.254: R27.1 87.12,42.42 89.03,44.32 89.03,51.69 88.39,52.32 75.69,52.32 75.31,52.7 U4.5
D27
  Top 0.254: R28.1 82.55,42.93 83.95,44.32 87.63,44.32 88.39,45.09 88.39,51.18 87.76,51.82 75.18,51.82 74.04,52.96 U4.6
D28
  Top 0.254: R29.1 69.34,43.81 68.58,44.58 64.01,44.58 63.63,44.96 63.63,46.23 64.01,46.61 73.41,46.61 74.04,47.24 U4.11
D29
  Top 0.254: R30.1 64.77,43.31 64.26,43.81 63.5,43.81 62.87,44.45 62.87,46.35 63.63,47.12 69.6,47.12 70.48,48.01 70.48,50.04 70.74,50.29 75.06,50.29 75.31,50.04 U4.12
D30
  Top 0.254: R31.1 60.2,42.67 59.44,43.43 59.44,48.39 60.33,49.28 68.83,49.28 70.36,50.8 76.07,50.8 76.58,50.29 U4.13
D31
  Top 0.254: R32.1 55.63,49.02 56.52,49.91 68.71,49.91 70.1,51.31 77.09,51.31 77.85,50.55 U4.14
D32
  Top 0.254: R33.1 50.04,80.01 48.39,81.66 36.45,81.66 34.8,80.01 32.13,80.01 31.62,80.52 U5.3
D33
  Top 0.254: R34.1 45.47,69.72 46.23,70.48 46.23,80.01 45.21,81.03 36.83,81.03 35.31,79.5 30.73,79.5 30.35,79.88 U5.4
D34
  Top 0.254: R35.1 40.89,69.09 42.8,70.99 42.8,78.36 42.16,78.99 29.46,78.99 29.08,79.38 U5.5
D35
  Top 0.254: R36.1 36.32,69.6 37.72,70.99 41.4,70.99 42.16,71.75 42.16,77.85 41.53,78.49 28.96,78.49 27.81,79.63 U5.6
D36
  Top 0.254: R37.1 23.11,70.48 22.35,71.25 17.78,71.25 17.4,71.63 17.4,72.9 17.78,73.28 27.18,73.28 27.81,73.91 U5.11
D37
  Top 0.254: R38.1 18.54,69.98 18.03,70.48 17.27,70.48 16.64,71.12 16.64,73.03 17.4,73.79 23.37,73.79 24.26,74.68 24.26,76.71 24.51,76.96 28.83,76.96 29.08,76.71 U5.12
D38
  Top 0.254: R39.1 13.97,69.34 13.21,70.1 13.21,75.06 14.1,75.95 22.61,75.95 24.13,77.47 29.84,77.47 30.35,76.96 U5.13
D39
  Top 0.254: R40.1 9.4,75.69 10.29,76.58 22.48,76.58 23.88,77.98 30.86,77.98 31.62,77.22 U5.14
D40
  Top 0.254: R41.1 96.27,80.01 94.61,81.66 82.68,81.66 81.03,80.01 78.36,80.01 77.85,80.52 U6.3
D41
  Top 0.254: R42.1 91.69,69.72 92.46,70.48 92.46,80.01 91.44,81.03 83.06,81.03 81.53,79.5 76.96,79.5 76.58,79.88 U6.4
D42
  Top 0.254: R43.1 87.12,69.09 89.03,70.99 89.03,78.36 88.39,78.99 75.69,78.99 75.31,79.38 U6.5
D43
  Top 0.254: R44.1 82.55,69.6 83.95,70.99 87.63,70.99 88.39,71.75 88.39,77.85 87.76,78.49 75.18,78.49 74.04,79.63 U6.6
D44
  Top 0.254: R45.1 69.34,70.48 68.58,71.25 64.01,71.25 63.63,71.63 63.63,72.9 64.01,73.28 73.41,73.28 74.04,73.91 U6.11
D45
  Top 0.254: R46.1 64.77,69.98 64.26,70.48 63.5,70.48 62.87,71.12 62.87,73.03 63.63,73.79 69.6,73.79 70.48,74.68 70.48,76.71 70.74,76.96 75.06,76.96 75.31,76.71 U6.12
D46
  Top 0.254: R47.1 60.2,69.34 59.44,70.1 59.44,75.06 60.33,75.95 68.83,75.95 70.36,77.47 76.07,77.47 76.58,76.96 U6.13
D47
  Top 0.254: R48.1 55.63,75.69 56.52,76.58 68.71,76.58 70.1,77.98 77.09,77.98 77.85,77.22 U6.14
D48
  Top 0.254: R49.1 50.04,106.68 48.39,108.33 36.45,108.33 34.8,106.68 32.13,106.68 31.62,107.19 U7.3
D49
  Top 0.254: R50.1 45.47,96.39 46.23,97.16 46.23,106.68 45.21,107.7 36.83,107.7 35.31,106.17 30.73,106.17 30.35,106.55 U7.4
D50
  Top 0.254: R51.1 40.89,95.76 42.8,97.66 42.8,105.03 42.16,105.66 29.46,105.66 29.08,106.05 U7.5
D51
  Top 0.254: R52.1 36.32,96.27 37.72,97.66 41.4,97.66 42.16,98.42 42.16,104.52 41.53,105.16 28.96,105.16 27.81,106.3 U7.6
D52
  Top 0.254: R53.1 23.11,97.16 22.35,97.92 17.78,97.92 17.4,98.3 17.4,99.57 17.78,99.95 27.18,99.95 27.81,100.58 U7.11
D53
  Top 0.254: R54.1 18.54,96.65 18.03,97.16 17.27,97.16 16.64,97.79 16.64,99.69 17.4,100.46 23.37,100.46 24.26,101.35 24.26,103.38 24.51,103.63 28.83,103.63 29.08,103.38 U7.12
D54
  Top 0.254: R55.1 13.97,96.01 13.21,96.77 13.21,101.73 14.1,102.62 22.61,102.62 24.13,104.14 29.84,104.14 30.35,103.63 U7.13
D55
  Top 0.254: R56.1 9.4,102.36 10.29,103.25 22.48,103.25 23.88,104.65 30.86,104.65 31.62,103.89 U7.14
D56
  Top 0.254: R57.1 96.27,106.68 94.61,108.33 82.68,108.33 81.03,106.68 78.36,106.68 77.85,107.19 U8.3
D57
  Top 0.254: R58.1 91.69,96.39 92.46,97.16 92.46,106.68 91.44,107.7 83.06,107.7 81.53,106.17 76.96,106.17 76.58,106.55 U8.4
D58
  Top 0.254: R59.1 87.12,95.76 89.03,97.66 89.03,105.03 88.39,105.66 75.69,105.66 75.31,106.05 U8.5
D59
  Top 0.254: R60.1 82.55,96.27 83.95,97.66 87.63,97.66 88.39,98.42 88.39,104.52 87.76,105.16 75.18,105.16 74.04,106.3 U8.6
D60
  Top 0.254: R61.1 69.34,97.16 68.58,97.92 64.01,97.92 63.63,98.3 63.63,99.57 64.01,99.95 73.41,99.95 74.04,100.58 U8.11
D61
  Top 0.254: R62.1 64.77,96.65 64.26,97.16 63.5,97.16 62.87,97.79 62.87,99.69 63.63,100.46 69.6,100.46 70.48,101.35 70.48,103.38 70.74,103.63 75.06,103.63 75.31,103.38 U8.12
D62
  Top 0.254: R63.1 60.2,96.01 59.44,96.77 59.44,101.73 60.33,102.62 68.83,102.62 70.36,104.14 76.07,104.14 76.58,103.63 U8.13
D63
  Top 0.254: R64.1 55.63,102.36 56.52,103.25 68.71,103.25 70.1,104.65 77.09,104.65 77.85,103.89 U8.14
GND  (via drill 0.51)
  Top 0.254: U1.16 v34.16,24.13 | v23.37,27.94 24.64,29.21 25.27,29.21
  Top 0.508: U1.8 25.27,29.21 25.27,29.97 25.15,30.1
  Top 1.016: JP13.6 36.07,31.75 34.42,30.1 25.15,30.1 25.02,30.1 23.37,31.75 JP2.1
  Bottom 0.254: v34.16,24.13 34.16,25.4 30.35,29.21 24.64,29.21 v23.37,27.94
GND1  (via drill 0.51)
  Top 0.254: U2.16 v80.39,24.13 | v69.6,27.94 70.87,29.21 71.5,29.21
  Top 0.508: U2.8 71.5,29.21 71.5,29.97 71.37,30.1
  Top 1.016: JP26.6 82.3,31.75 80.64,30.1 71.37,30.1 71.25,30.1 69.6,31.75 JP15.1
  Bottom 0.254: v80.39,24.13 80.39,25.4 76.58,29.21 70.87,29.21 v69.6,27.94
GND2  (via drill 0.51)
  Top 0.254: U3.16 v34.16,50.8 | v23.37,54.61 24.64,55.88 25.27,55.88
  Top 0.508: U3.8 25.27,55.88 25.27,56.64 25.15,56.77
  Top 1.016: JP40.6 36.07,58.42 34.42,56.77 25.15,56.77 25.02,56.77 23.37,58.42 JP29.1
  Bottom 0.254: v34.16,50.8 34.16,52.07 30.35,55.88 24.64,55.88 v23.37,54.61
GND3  (via drill 0.51)
  Top 0.254: U4.16 v80.39,50.8 | v69.6,54.61 70.87,55.88 71.5,55.88
  Top 0.508: U4.8 71.5,55.88 71.5,56.64 71.37,56.77
  Top 1.016: JP54.6 82.3,58.42 80.64,56.77 71.37,56.77 71.25,56.77 69.6,58.42 JP43.1
  Bottom 0.254: v80.39,50.8 80.39,52.07 76.58,55.88 70.87,55.88 v69.6,54.61
GND4  (via drill 0.51)
  Top 0.254: U5.16 v34.16,77.47 | v23.37,81.28 24.64,82.55 25.27,82.55
  Top 0.508: U5.8 25.27,82.55 25.27,83.31 25.15,83.44
  Top 1.016: JP68.6 36.07,85.09 34.42,83.44 25.15,83.44 25.02,83.44 23.37,85.09 JP57.1
  Bottom 0.254: v34.16,77.47 34.16,78.74 30.35,82.55 24.64,82.55 v23.37,81.28
GND5  (via drill 0.51)
  Top 0.254: U6.16 v80.39,77.47 | v69.6,81.28 70.87,82.55 71.5,82.55
  Top 0.508: U6.8 71.5,82.55 71.5,83.31 71.37,83.44
  Top 1.016: JP82.6 82.3,85.09 80.64,83.44 71.37,83.44 71.25,83.44 69.6,85.09 JP71.1
  Bottom 0.254: v80.39,77.47 80.39,78.74 76.58,82.55 70.87,82.55 v69.6,81.28
GND6  (via drill 0.51)
  Top 0.254: U7.16 v34.16,104.14 | v23.37,107.95 24.64,109.22 25.27,109.22
  Top 0.508: U7.8 25.27,109.22 25.27,109.98 25.15,110.11
  Top 1.016: JP96.6 36.07,111.76 34.42,110.11 25.15,110.11 25.02,110.11 23.37,111.76 JP85.1
  Bottom 0.254: v34.16,104.14 34.16,105.41 30.35,109.22 24.64,109.22 v23.37,107.95
GND7  (via drill 0.51)
  Top 0.254: U8.16 v80.39,104.14 | v69.6,107.95 70.87,109.22 71.5,109.22
  Top 0.508: U8.8 71.5,109.22 71.5,109.98 71.37,110.11
  Top 1.016: JP110.6 82.3,111.76 80.64,110.11 71.37,110.11 71.25,110.11 69.6,111.76 JP99.1
  Bottom 0.254: v80.39,104.14 80.39,105.41 76.58,109.22 70.87,109.22 v69.6,107.95
LATCH  (via drill 0.51)
  Top 0.254: JP2.2 v22.1,29.21 | U1.10 v26.54,20.95 | JP13.5 v42.93,29.21
  Bottom 0.254: v26.54,20.95 26.54,23.5 24.64,25.4 23.37,25.4 22.1,26.67 v22.1,29.21 23.37,30.48 42.42,30.48 42.93,29.97 v42.93,29.21
LATCH1  (via drill 0.51)
  Top 0.254: JP15.2 v68.33,29.21 | U2.10 v72.77,20.95 | JP26.5 v89.15,29.21
  Bottom 0.254: v72.77,20.95 72.77,23.5 70.87,25.4 69.6,25.4 68.33,26.67 v68.33,29.21 69.6,30.48 88.65,30.48 89.15,29.97 v89.15,29.21
LATCH2  (via drill 0.51)
  Top 0.254: JP29.2 v22.1,55.88 | U3.10 v26.54,47.62 | JP40.5 v42.93,55.88
  Bottom 0.254: v26.54,47.62 26.54,50.16 24.64,52.07 23.37,52.07 22.1,53.34 v22.1,55.88 23.37,57.15 42.42,57.15 42.93,56.64 v42.93,55.88
LATCH3  (via drill 0.51)
  Top 0.254: JP43.2 v68.33,55.88 | U4.10 v72.77,47.62 | JP54.5 v89.15,55.88
  Bottom 0.254: v72.77,47.62 72.77,50.16 70.87,52.07 69.6,52.07 68.33,53.34 v68.33,55.88 69.6,57.15 88.65,57.15 89.15,56.64 v89.15,55.88
LATCH4  (via drill 0.51)
  Top 0.254: JP57.2 v22.1,82.55 | U5.10 v26.54,74.3 | JP68.5 v42.93,82.55
  Bottom 0.254: v26.54,74.3 26.54,76.83 24.64,78.74 23.37,78.74 22.1,80.01 v22.1,82.55 23.37,83.82 42.42,83.82 42.93,83.31 v42.93,82.55
LATCH5  (via drill 0.51)
  Top 0.254: JP71.2 v68.33,82.55 | U6.10 v72.77,74.3 | JP82.5 v89.15,82.55
  Bottom 0.254: v72.77,74.3 72.77,76.83 70.87,78.74 69.6,78.74 68.33,80.01 v68.33,82.55 69.6,83.82 88.65,83.82 89.15,83.31 v89.15,82.55
LATCH6  (via drill 0.51)
  Top 0.254: JP85.2 v22.1,109.22 | U7.10 v26.54,100.97 | JP96.5 v42.93,109.22
  Bottom 0.254: v26.54,100.97 26.54,103.5 24.64,105.41 23.37,105.41 22.1,106.68 v22.1,109.22 23.37,110.49 42.42,110.49 42.93,109.98 v42.93,109.22
LATCH7  (via drill 0.51)
  Top 0.254: JP99.2 v68.33,109.22 | U8.10 v72.77,100.97 | JP110.5 v89.15,109.22
  Bottom 0.254: v72.77,100.97 72.77,103.5 70.87,105.41 69.6,105.41 68.33,106.68 v68.33,109.22 69.6,110.49 88.65,110.49 89.15,109.98 v89.15,109.22
S0
  Top 0.254: R1.2 JP1.1
S1
  Top 0.254: R2.2 JP4.1
S2
  Top 0.254: R3.2 JP5.1
S3
  Top 0.254: R4.2 JP6.1
S4
  Top 0.254: R5.2 JP7.1
S5
  Top 0.254: R6.2 JP8.1
S6
  Top 0.254: R7.2 JP9.1
S7
  Top 0.254: R8.2 JP10.1
S8
  Top 0.254: R9.2 JP16.1
S9
  Top 0.254: R10.2 JP17.1
S10
  Top 0.254: R11.2 JP18.1
S11
  Top 0.254: R12.2 JP19.1
S12
  Top 0.254: R13.2 JP20.1
S13
  Top 0.254: R14.2 JP21.1
S14
  Top 0.254: R15.2 JP22.1
S15
  Top 0.254: R16.2 JP23.1
S16
  Top 0.254: R17.2 JP30.1
S17
  Top 0.254: R18.2 JP31.1
S18
  Top 0.254: R19.2 JP32.1
S19
  Top 0.254: R20.2 JP33.1
S20
  Top 0.254: R21.2 JP34.1
S21
  Top 0.254: R22.2 JP35.1
S22
  Top 0.254: R23.2 JP36.1
S23
  Top 0.254: R24.2 JP37.1
S24
  Top 0.254: R25.2 JP44.1
S25
  Top 0.254: R26.2 JP45.1
S26
  Top 0.254: R27.2 JP46.1
S27
  Top 0.254: R28.2 JP47.1
S28
  Top 0.254: R29.2 JP48.1
S29
  Top 0.254: R30.2 JP49.1
S30
  Top 0.254: R31.2 JP50.1
S31
  Top 0.254: R32.2 JP51.1
S32
  Top 0.254: R33.2 JP58.1
S33
  Top 0.254: R34.2 JP59.1
S34
  Top 0.254: R35.2 JP60.1
S35
  Top 0.254: R36.2 JP61.1
S36
  Top 0.254: R37.2 JP62.1
S37
  Top 0.254: R38.2 JP63.1
S38
  Top 0.254: R39.2 JP64.1
S39
  Top 0.254: R40.2 JP65.1
S40
  Top 0.254: R41.2 JP72.1
S41
  Top 0.254: R42.2 JP73.1
S42
  Top 0.254: R43.2 JP74.1
S43
  Top 0.254: R44.2 JP75.1
S44
  Top 0.254: R45.2 JP76.1
S45
  Top 0.254: R46.2 JP77.1
S46
  Top 0.254: R47.2 JP78.1
S47
  Top 0.254: R48.2 JP79.1
S48
  Top 0.254: R49.2 JP86.1
S49
  Top 0.254: R50.2 JP87.1
S50
  Top 0.254: R51.2 JP88.1
S51
  Top 0.254: R52.2 JP89.1
S52
  Top 0.254: R53.2 JP90.1
S53
  Top 0.254: R54.2 JP91.1
S54
  Top 0.254: R55.2 JP92.1
S55
  Top 0.254: R56.2 JP93.1
S56
  Top 0.254: R57.2 JP100.1
S57
  Top 0.254: R58.2 JP101.1
S58
  Top 0.254: R59.2 JP102.1
S59
  Top 0.254: R60.2 JP103.1
S60
  Top 0.254: R61.2 JP104.1
S61
  Top 0.254: R62.2 JP105.1
S62
  Top 0.254: R63.2 JP106.1
S63
  Top 0.254: R64.2 JP107.1
SER_IN  (via drill 0.51)
  Top 0.254: JP13.3 v36.7,24.13 | U1.2 32.89,29.08 33.02,29.21 34.8,29.21 35.18,29.59 36.32,29.59 v36.7,29.21
  Bottom 0.254: v36.7,24.13 36.7,25.02 36.32,25.4 36.32,28.83 v36.7,29.21
SER_IN1  (via drill 0.51)
  Top 0.254: JP26.3 v82.93,24.13 | U2.2 79.12,29.08 79.25,29.21 81.03,29.21 81.41,29.59 82.55,29.59 v82.93,29.21
  Bottom 0.254: v82.93,24.13 82.93,25.02 82.55,25.4 82.55,28.83 v82.93,29.21
SER_IN2  (via drill 0.51)
  Top 0.254: JP40.3 v36.7,50.8 | U3.2 32.89,55.75 33.02,55.88 34.8,55.88 35.18,56.26 36.32,56.26 v36.7,55.88
  Bottom 0.254: v36.7,50.8 36.7,51.69 36.32,52.07 36.32,55.5 v36.7,55.88
SER_IN3  (via drill 0.51)
  Top 0.254: JP54.3 v82.93,50.8 | U4.2 79.12,55.75 79.25,55.88 81.03,55.88 81.41,56.26 82.55,56.26 v82.93,55.88
  Bottom 0.254: v82.93,50.8 82.93,51.69 82.55,52.07 82.55,55.5 v82.93,55.88
SER_IN4  (via drill 0.51)
  Top 0.254: JP68.3 v36.7,77.47 | U5.2 32.89,82.42 33.02,82.55 34.8,82.55 35.18,82.93 36.32,82.93 v36.7,82.55
  Bottom 0.254: v36.7,77.47 36.7,78.36 36.32,78.74 36.32,82.17 v36.7,82.55
SER_IN5  (via drill 0.51)
  Top 0.254: JP82.3 v82.93,77.47 | U6.2 79.12,82.42 79.25,82.55 81.03,82.55 81.41,82.93 82.55,82.93 v82.93,82.55
  Bottom 0.254: v82.93,77.47 82.93,78.36 82.55,78.74 82.55,82.17 v82.93,82.55
SER_IN6  (via drill 0.51)
  Top 0.254: JP96.3 v36.7,104.14 | U7.2 32.89,109.09 33.02,109.22 34.8,109.22 35.18,109.6 36.32,109.6 v36.7,109.22
  Bottom 0.254: v36.7,104.14 36.7,105.03 36.32,105.41 36.32,108.84 v36.7,109.22
SER_IN7  (via drill 0.51)
  Top 0.254: JP110.3 v82.93,104.14 | U8.2 79.12,109.09 79.25,109.22 81.03,109.22 81.41,109.6 82.55,109.6 v82.93,109.22
  Bottom 0.254: v82.93,104.14 82.93,105.03 82.55,105.41 82.55,108.84 v82.93,109.22
SER_OUT  (via drill 0.51)
  Top 0.254: JP2.4 v22.1,24.13 | U1.9 v25.27,20.95
  Bottom 0.254: v25.27,20.95 25.27,23.5 24.64,24.13 v22.1,24.13
SER_OUT1  (via drill 0.51)
  Top 0.254: JP15.4 v68.33,24.13 | U2.9 v71.5,20.95
  Bottom 0.254: v71.5,20.95 71.5,23.5 70.87,24.13 v68.33,24.13
SER_OUT2  (via drill 0.51)
  Top 0.254: JP29.4 v22.1,50.8 | U3.9 v25.27,47.62
  Bottom 0.254: v25.27,47.62 25.27,50.16 24.64,50.8 v22.1,50.8
SER_OUT3  (via drill 0.51)
  Top 0.254: JP43.4 v68.33,50.8 | U4.9 v71.5,47.62
  Bottom 0.254: v71.5,47.62 71.5,50.16 70.87,50.8 v68.33,50.8
SER_OUT4  (via drill 0.51)
  Top 0.254: JP57.4 v22.1,77.47 | U5.9 v25.27,74.3
  Bottom 0.254: v25.27,74.3 25.27,76.83 24.64,77.47 v22.1,77.47
SER_OUT5  (via drill 0.51)
  Top 0.254: JP71.4 v68.33,77.47 | U6.9 v71.5,74.3
  Bottom 0.254: v71.5,74.3 71.5,76.83 70.87,77.47 v68.33,77.47
SER_OUT6  (via drill 0.51)
  Top 0.254: JP85.4 v22.1,104.14 | U7.9 v25.27,100.97
  Bottom 0.254: v25.27,100.97 25.27,103.5 24.64,104.14 v22.1,104.14
SER_OUT7  (via drill 0.51)
  Top 0.254: JP99.4 v68.33,104.14 | U8.9 v71.5,100.97
  Bottom 0.254: v71.5,100.97 71.5,103.5 70.87,104.14 v68.33,104.14

## Text on the board
Dimension: Route Out | Route Out | Route Out | Route Out | Route Out | Route Out | Route Out | Route Out | Route Out | Route Out
tPlace: GND | GND | GND | GND | NC | NC | LAT | NC | NC | LAT | LAT | LAT | CLK | CLK | CLK | CLK | SER | SER | SER | SER | 5V | 5V | 5V | 5V | 12V | 12V | 12V | 12V | OUT | Large Digit Driver | IN | OUT | Large Digit Driver | IN | DP | 12V | DP | 12V | B | C | D | E | G | F | A | B | C | D | E | G | F | A | GND | GND | GND | GND | NC | NC | LAT | NC | NC | LAT | LAT | LAT | CLK | CLK | CLK | CLK | SER | SER | SER | SER | 5V | 5V | 5V | 5V | 12V | 12V | 12V | 12V | OUT | Large Digit Driver | IN | OUT | Large Digit Driver | IN | DP | 12V | DP | 12V | B | C | D | E | G | F | A | B | C | D | E | G | F | A | GND | GND | GND | GND | LAT | LAT | NC | NC | NC | NC | LAT | LAT | CLK | CLK | CLK | CLK | SER | SER | SER | SER | 5V | 5V | 5V | 5V | 12V | 12V | 12V | 12V | OUT | IN | OUT | IN | Large Digit Driver | Large Digit Driver | DP | DP | B | C | D | 12V | E | G | F | A | B | C | D | 12V | E | G | F | A | GND | GND | GND | GND | NC | NC | LAT | NC | NC | LAT | LAT | LAT | CLK | CLK | CLK | CLK | SER | SER | SER | SER | 5V | 5V | 5V | 5V | 12V | 12V | 12V | 12V | OUT | Large Digit Driver | IN | OUT | Large Digit Driver | IN | DP | 12V | DP | 12V | B | C | D | E | G | F | A | B | C | D | E | G | F | A
bPlace: GND | GND | GND | GND | LAT | LAT | LAT | LAT | CLK | CLK | CLK | CLK | SER | SER | SER | SER | 5V | 5V | 5V | 5V | 12V | 12V | 12V | 12V | TPIC6C596 | TPIC6C596 | OUT | IN | OUT | IN | Large Digit Driver | Large Digit Driver | GND | GND | GND | GND | LAT | LAT | LAT | LAT | CLK | CLK | CLK | CLK | SER | SER | SER | SER | 5V | 5V | 5V | 5V | 12V | 12V | 12V | 12V | TPIC6C596 | TPIC6C596 | OUT | IN | OUT | IN | Large Digit Driver | Large Digit Driver | GND | GND | GND | GND | LAT | LAT | LAT | LAT | CLK | CLK | CLK | CLK | SER | SER | SER | SER | 5V | 5V | 5V | 5V | 12V | 12V | 12V | 12V | OUT | TPIC6C596 | IN | OUT | TPIC6C596 | IN | Large Digit Driver | Large Digit Driver | GND | GND | GND | GND | LAT | LAT | LAT | LAT | CLK | CLK | CLK | CLK | SER | SER | SER | SER | 5V | 5V | 5V | 5V | 12V | 12V | 12V | 12V | TPIC6C596 | TPIC6C596 | OUT | IN | OUT | IN | Large Digit Driver | Large Digit Driver